# EAGLE board LighterBoard (EAGLE 7.2.0)
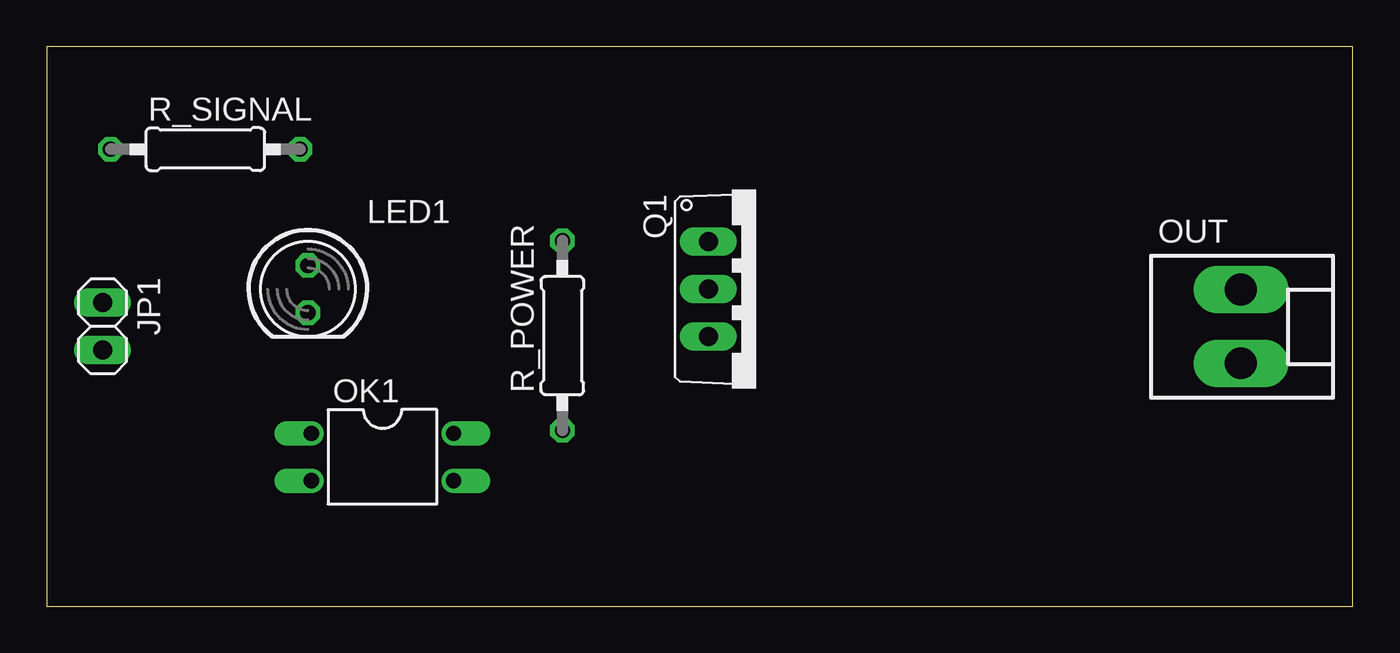
[diagram p0: board, top side]
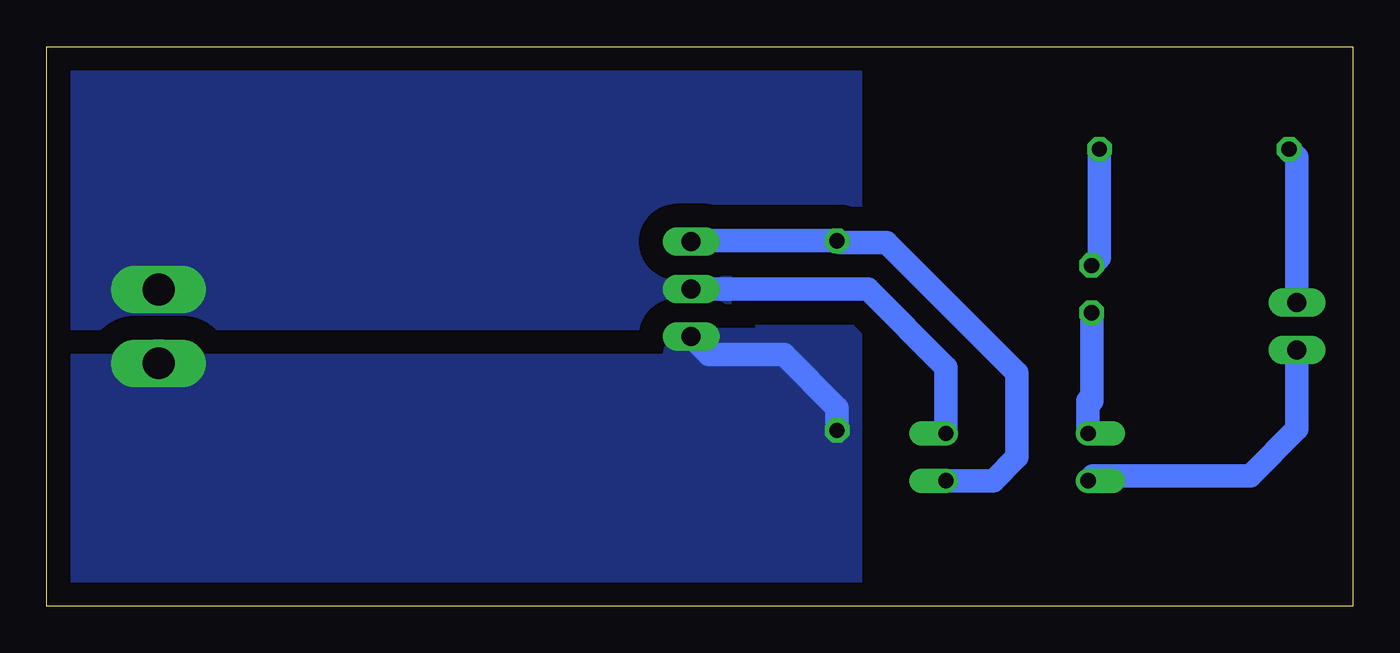
[diagram p1: board, bottom side, seen from below]

Size 70 x 30 mm. Coordinates in mm from the lower left corner, seen from the top.
Outline: 0,0 70,0 70,30 0,30 0,0
Copper layers (1*16): Top 0.035mm / dielectric 1.5mm / Bottom 0.035mm
Design rules "default": minimum track width 10mil, minimum drill 24mil, track to track 8mil, track to pad 8mil, pad to pad 8mil, via to via 8mil, smd to smd 8mil, copper to edge 40mil, drill to drill 8mil, minimum pad ring 10mil, minimum via ring 8mil, stop-mask expansion 4mil, vias tented up to drill 0mil, thermal gap 10mil

## Footprints (pad centres in the part's own frame; a part is rotated, then mirrored left to right if it is on the bottom)
1X02 = drill 1.016 long: 1 -1.27,0; 2 1.27,0
LED5MM = drill 0.813 octagon: A -1.27,0; K 1.27,0
DIL04 = drill 0.813 offset: 1 -1.27,-3.81; 2 1.27,-3.81; 3 1.27,3.81; 4 -1.27,3.81
KK-156-2 = drill 1.7 pad 2.184 long: 1 -1.98,0; 2 1.98,0
TO220V = drill 1.016 long: 1 -2.54,-2.54; 2 0,-2.54; 3 2.54,-2.54
0207/10 = drill 0.813 octagon: 1 -5.08,0; 2 5.08,0

## Placement (x,y rotation side)
JP1  [1X02]  3,15 270 top
LED1  [LED5MM]  14,17 270 top
OK1  PC817  [DIL04]  18,8 270 top
OUT  [KK-156-2]  64,15 270 top
Q1  IRF620  [TO220V]  38,17 270 top
R_POWER  [0207/10]  27.64,14.51 90 top
R_SIGNAL  [0207/10]  8.5,24.5 0 top

## Library data of the parts
JP1 = pinhead
LED1 = led
OK1 = optocoupler; MPN: PC817X4J000F; OC_FARNELL: 9707727; OC_NEWARK: 97K7059
OUT = con-molex; OC_FARNELL: unknown; OC_NEWARK: unknown
Q1 = transistor-fet
R_POWER R_SIGNAL = rcl

## Nets
LOAD: OK1.4 OUT.1 Q1.2
N$1: JP1.1 R_SIGNAL.1
N$2: LED1.A R_SIGNAL.2
N$3: LED1.K OK1.1
N$5: OK1.3 Q1.1 R_POWER.2
POWER_GND: OUT.2 Q1.3 R_POWER.1
SIGNAL_GND: JP1.2 OK1.2

## Tracks (layer width: path | path; a pad name or v marks a point on that pad's centre or on a via)
LOAD
  Bottom 1.27: OK1.4 21.81,12.81 26,17 Q1.2
  pour Bottom (isolate 1.27, no thermals): 74,15 33.5,15 33.5,18.5 26.5,18.5 26.5,35 74,35
N$1
  Bottom 1.27: JP1.1 3,24.08 R_SIGNAL.1
N$2
  Bottom 1.27: R_SIGNAL.2 13.58,18.69 LED1.A
N$3
  Bottom 1.27: LED1.K 14,11 14.19,11 OK1.1
N$4
  cutout Top (no thermals): 25,18 25,14.5 35,14.5 35,18
N$5
  Bottom 1.27: Q1.1 35.41,19.59 R_POWER.2 27.55,19.5 25,19.5 18,12.5 18,8 19.27,6.73 OK1.3
POWER_GND
  Bottom 1.27: R_POWER.1 27.64,10.64 30.5,13.5 34.5,13.5 Q1.3
  pour Bottom (isolate 1.27, rank 2, no thermals): 70,15 26.5,15 26.5,0 70,0
SIGNAL_GND
  Bottom 1.27: JP1.2 3,9.5 5.5,7 13.92,7 OK1.2